# Altium PCB PT100.PcbDoc
Units mm, origin at the board's own origin, x right, y up, seen from the top; angles counter-clockwise.
Board outline 95.12 x 71.37 mm, 2 copper layers (Top Layer, Bottom Layer); 40 components, 28 nets, 103 pads, 11 vias.
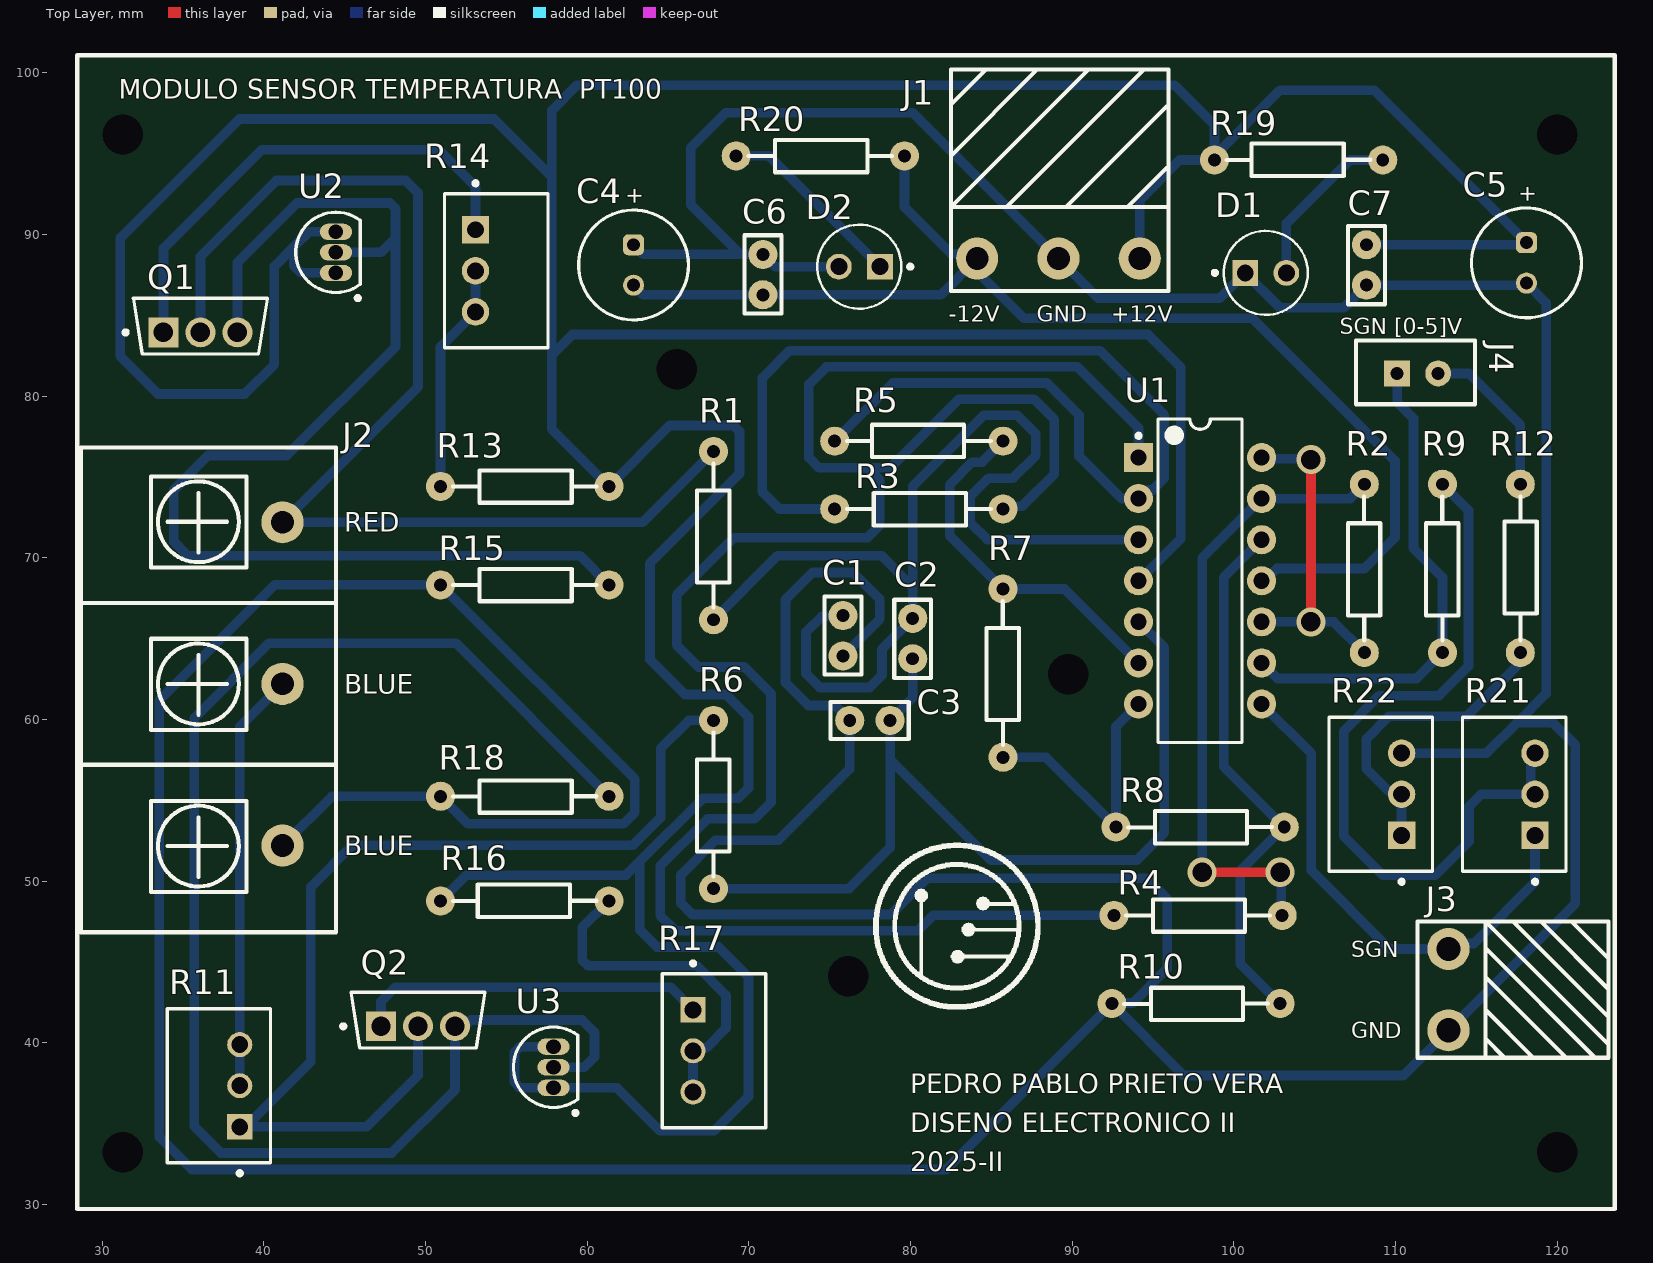
[diagram p0: Top Layer view]
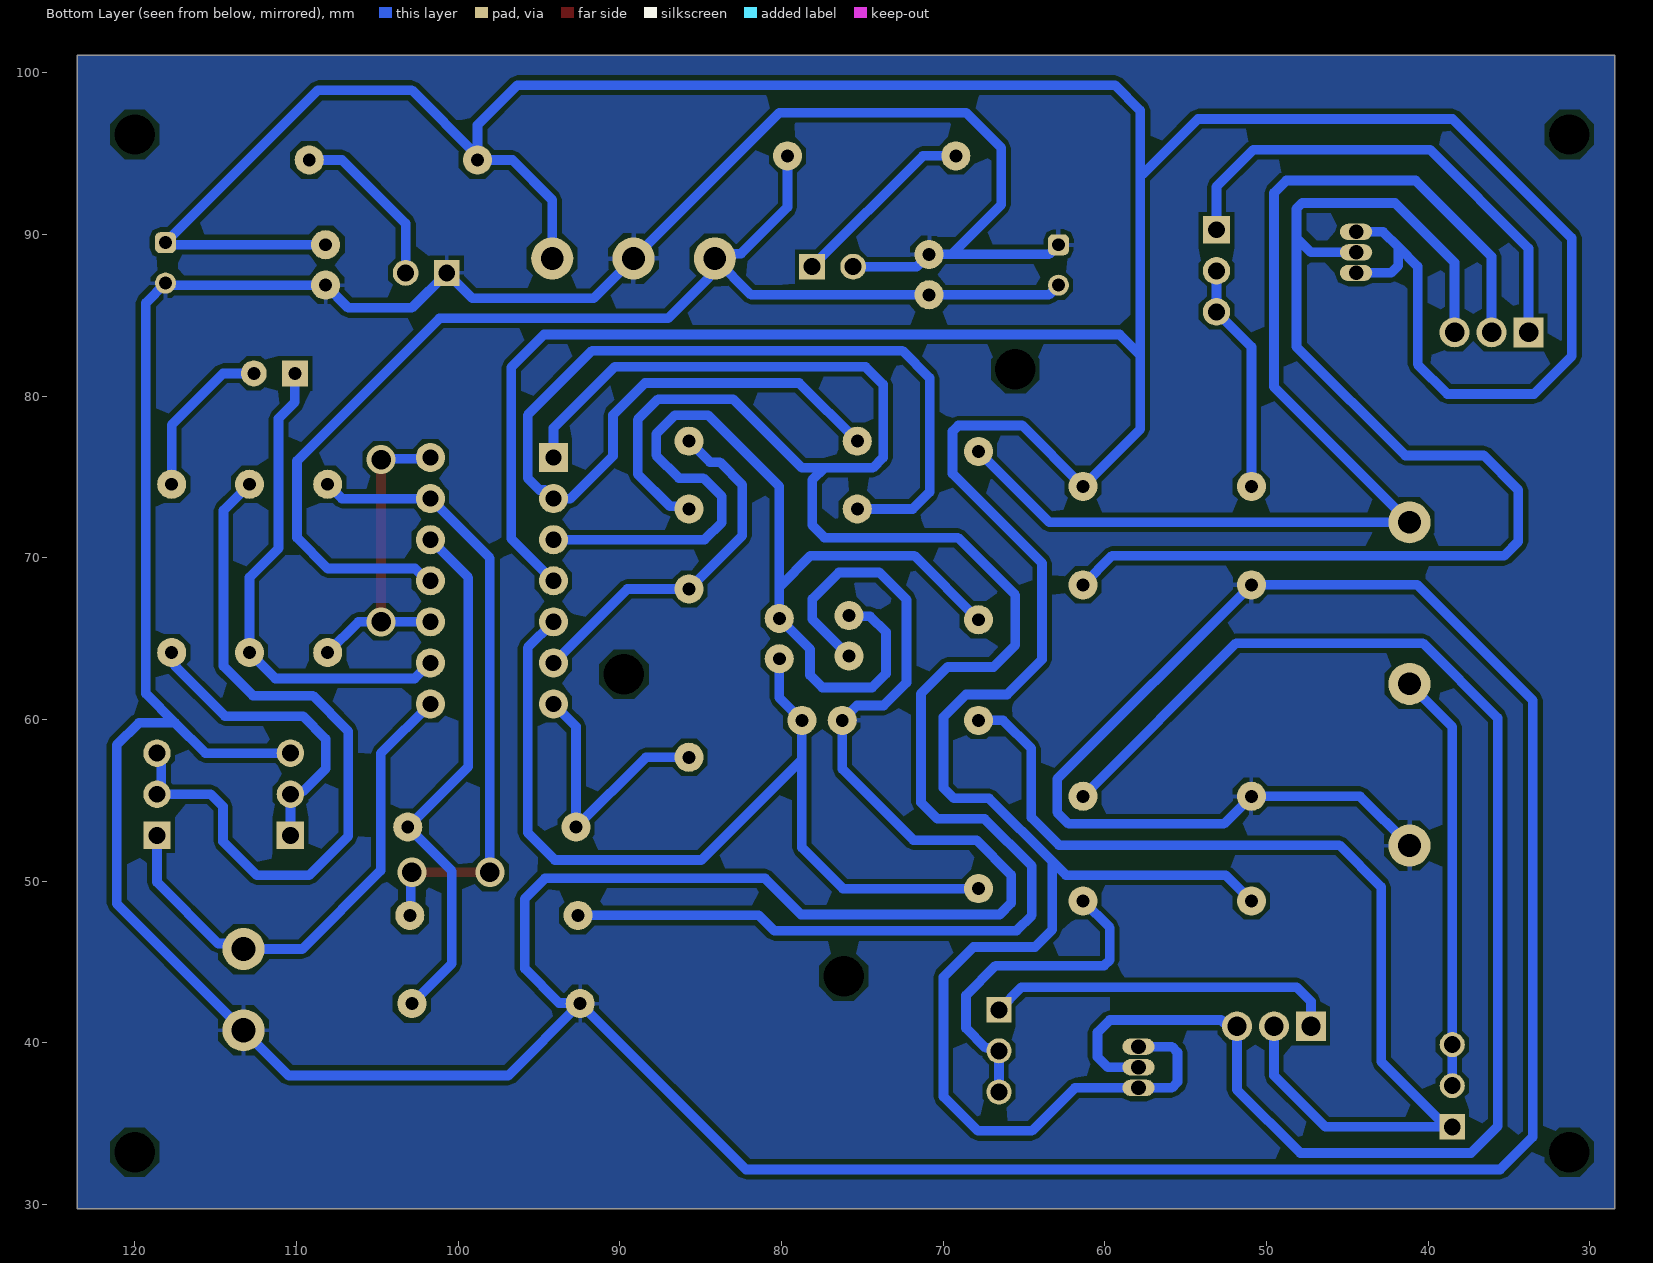
[diagram p1: Bottom Layer view, seen from below]

## Layer stack, top to bottom
Top Solder: solder mask 0.0102, Solder Resist, Dk 3.5
Top Layer: signal copper 0.0356
Dielectric 1: dielectric 0.32, FR-4, Dk 4.8
Bottom Layer: signal copper 0.0356
Bottom Solder: solder mask 0.0102, Solder Resist, Dk 3.5

## Board outline
28.448,29.718 28.448,101.092 123.571,101.092 123.571,29.718

## Design rules (kind name [scope] priority, off if disabled: settings)
Clearance [All] p1: gap=0.27 ignorepadtopadclearanceinfootprint=FALSE
PolygonConnect [All] p1: connectstyle=Relief reliefconductorwidth=0.254 reliefentries=4 polygonreliefangle="90 Angle" airgapwidth=0.254
RoutingVias [All] p1: holewidth=0.711 width=1.27 viastyle="Through Hole" minholewidth=0.711 minwidth=1.27 maxholewidth=0.711 maxwidth=1.27
SolderMaskExpansion [All] p1: expansion=0.102 istentingtop=FALSE
Width [All] p1: maxlimit=0.9 minlimit=0.6 preferedwidth=0.6
30 further rules are at their usual default settings.

## Components (designator, comment, footprint, x,y, rotation, side; value= is the part's Value field where it differs from the comment)
C1 "220pF" CAP_CER_2.5mm 75.819,63.921 r90 top
C2 "10nF" CAP_CER_2.5mm 80.137,66.254 r270 top
C3 "220pF" CAP_CER_2.5mm 78.74,59.944 r180 top
C4 "1uF" WCAP-ATG8_D6.3H11 62.865,88.118 r90 top
C5 "1uF" WCAP-ATG8_D6.3H11 118.11,88.245 r90 top
C6 "100nF" CAP_CER_2.5mm 70.866,86.273 r90 top
C7 "100nF" CAP_CER_2.5mm 108.204,89.368 r270 top
D1 "TLLG4400-AS12" FP-6_544-5255_01-4-MFG 101.981,87.63 r0 top
D2 "TLLG4400-AS12" FP-6_544-5255_01-4-MFG 76.835,88.011 r180 top
J1 "BORNERA_3P" BORNERA_3P 94.184,88.519 r180 top
J2 "BORNERA KF1000" "KF1000 - 10 - 3P" 41.148,62.197 r270 top
J3 "BORNERA_2P_NT" BORNERA_2P_NT 118.364,43.18 r90 top
J4 "TSW-2P" TSW-2P 110.109,81.407 r0 top
Q1 "BD140" FP-340AS-MFG 36.068,84.334 r90 top
Q2 "BD140" FP-340AS-MFG 49.53,41.402 r90 top
R1 "3.9K" RES_10K_1/4W 67.818,67.31 r90 top
R2 "43K" RES_10K_1/4W 108.077,65.278 r90 top
R3 "24K" RES_10K_1/4W 84.582,73.025 r180 top
R4 "43K" RES_10K_1/4W 101.854,47.879 r180 top
R5 "1.41K" RES_10K_1/4W 76.454,77.216 r0 top
R6 "3.9K" RES_10K_1/4W 67.818,50.673 r90 top
R7 "24K" RES_10K_1/4W 85.725,58.801 r90 top
R8 "43K" RES_10K_1/4W 101.981,53.34 r180 top
R9 "1K" RES_10K_1/4W 112.916,65.278 r90 top
R10 "43K" RES_10K_1/4W 101.727,42.418 r180 top
R11 "100 Ohms" BOUR-3299W-3_V#1 37.211,37.338 r90 top
R12 "1K" RES_10K_1/4W 117.729,73.406 r270 top
R13 "1.764K" RES_10K_1/4W 60.198,74.422 r180 top
R14 "500 Ohms" BOUR-3299W-3_V#2 54.376,87.757 r270 top
R15 "1K" RES_10K_1/4W 60.198,68.326 r180 top
R16 "1.764K" RES_10K_1/4W 52.07,48.768 r0 top
R17 "500 Ohms" BOUR-3299W-3_V#1 67.838,39.497 r270 top
R18 "1K" RES_10K_1/4W 60.198,55.245 r180 top
R19 "1k" RES_10K_1/4W 99.949,94.615 r0 top
R20 "1k" RES_10K_1/4W 78.486,94.869 r180 top
R21 "100 Ohms" BOUR-3299W-3_V#2 117.348,55.372 r90 top
R22 "100 Ohms" BOUR-3299W-3_V#2 109.093,55.372 r90 top
U1 "TL084MJ" J0014A 97.917,68.58 r0 top
U2 "TL431CZ" TO-92 44.45,88.9 r0 top
U3 "TL431CZ" TO-92 57.912,38.481 r0 top

## Footprints (in the part's own frame and the unit in brackets; to place one, negate y for a bottom-side part, rotate by r counter-clockwise, add the part's x,y. Pads: shape width x height; smd on the part's side, far side on the other; paste and mask are expansions set on the pad)
BORNERA_2P_NT [mm]
  round 2.6 hole 1.5: 1(-2.413,5.08) 2(2.617,5.08)
  silkscreen extent -4.11,-4.83 4.32,6.98, body extent -4.06,-2.29 4.44,6.86, height 7.1
BORNERA_3P [mm] "Bornera 3 pines 5.03mm"
  round 2.6 hole 1.4: 1(0,0) 2(5.03,0) 3(10.06,0)
  silkscreen extent -1.78,-11.7 11.68,2, body extent -1.16,-7.39 11.07,1.81, height 7
BOUR-3299W-3_V#1 [mm] "TH, 3-Leads, Body 9.53x6.4mm, Pitch 2.54mm"
  rect 1.55x1.55 hole 1.05: 1(-2.54,-1.29)
  round 1.55 hole 1.05: 2(0,-1.29) 3(2.54,-1.29)
  silkscreen extent -5.54,-3.2 4.76,3.2, body extent -4.76,-3.05 4.76,3.05, height 11.55
BOUR-3299W-3_V#2 [mm] "TH, 3-Leads, Body 9.53x6.4mm, Pitch 2.54mm"
  rect 1.7x1.7 hole 1.05: 1(-2.54,-1.29)
  round 1.7 hole 1.05: 2(0,-1.29) 3(2.54,-1.29)
  silkscreen extent -5.54,-3.2 4.76,3.2, body extent -4.76,-3.05 4.76,3.05, height 11.55
CAP_CER_2.5mm [mm] "Capacitor ceramico 2.5mm"
  round 1.8 hole 0.8: 1(0,0) 2(2.5,0)
  silkscreen extent -1.15,-1.14 3.68,1.14, body extent -1.23,-1.27 3.77,0.76, height 5.5
FP-6_544-5255_01-4-MFG [mm]
  rect 1.6x1.6 hole 1.05 paste-1000 mask+0: 1(-1.27,0)
  round 1.6 hole 1.05 paste-1000 mask+0: 2(1.27,0)
  silkscreen extent -3.27,-2.6 2.6,2.6, body extent -2.32,-2.32 2.32,2.32, height 0.25
FP-340AS-MFG [mm]
  rect 1.85x1.85 hole 1.2 paste-1000 mask+0: 1(-0.387,2.29)
  round 1.85 hole 1.2 paste-1000 mask+0: 2(-0.387,0) 3(-0.387,-2.29)
  silkscreen extent -1.73,-4.15 1.73,4.75, body extent -1.83,-4.25 1.83,4.25, height 0.25
J0014A [mm] "DIP, 14-Leads, Body 19.95x7.2mm, Pitch 2.54mm"
  rect 1.8x1.8 hole 1: 1(-3.81,7.62)
  round 1.8 hole 1: 2(-3.81,5.08) 3(-3.81,2.54) 4(-3.81,0) 5(-3.81,-2.54) 6(-3.81,-5.08) 7(-3.81,-7.62) 8(3.81,-7.62) 9(3.81,-5.08) 10(3.81,-2.54) 11(3.81,0) 12(3.81,2.54) 13(3.81,5.08) 14(3.81,7.62)
  silkscreen extent -3.93,-10 2.6,10, body extent -3.96,-9.97 3.96,9.97, height 5.08
"KF1000 - 10 - 3P" [mm] "Bornera KF1000 10mm de 3 pines"
  round 2.6 hole 1.4: 0(-10,0) 1(0,0) 2(10,0)
  silkscreen extent -14.63,-12.47 15.37,3.3, body extent -14.95,-11.95 15.85,2.55, height 14.55
RES_10K_1/4W [mm] "Resistencia de 10Kohms de 1/4 de vatio"
  round 1.8 hole 0.8: 1(-1.143,0) 2(9.271,0)
  silkscreen extent -0.38,-0.98 8.51,1.02, body extent -1.45,-1.14 9.32,1.17, height 2.93
TO-92 [mm] "TO, Flat Index; 3 In-Line, Axial Leads; Body Dia. 4.7mm; Lead Dia. 0.56 mm (max)"
  oval 2x1 hole 0.9: 1(0,-1.27) 2(0,0) 3(0,1.27)
  silkscreen extent -2.48,-2.95 1.5,2.48, body extent -2.48,-2.5 1.5,2.5, height 4.95
TSW-2P [mm] "TSW PIN HEADER MALE 2P"
  rect 1.6x1.6 hole 0.8: 01(0,0)
  round 1.6 hole 0.8: 02(2.54,0)
  silkscreen extent -2.54,-1.91 4.83,2.03, body extent -1.27,-1.27 3.81,1.27, height 8.34
WCAP-ATG8_D6.3H11 [mm] "Aluminum Electrolytic Capacitors, 6.3x11mm"
  rrect50% 1.3x1.3 hole 0.8: 1(1.25,0)
  round 1.3 hole 0.8: 2(-1.25,0)
  silkscreen extent -3.4,-3.4 3.4,3.4, body extent -3.14,-3.15 3.15,3.15, height 11.31

## Part data
C1 C2 C3 C6 C7: library part CER_104, "Capactior ceramico 2.5mm"
C4 C5: library part CMP-207834-000007-2, "CAP 220 UF 20% 25 V", Capacitance=220µF, Case/Package=Radial, Leakage Current=55µA, Max Operating Temperature=85°C, Min Operating Temperature=-40°C, Ripple Current=310mA, Tolerance=20%, Voltage Rating=25V, Diameter=6.3mm, Dissipation Factor=14%, Height=11mm, Height - Seated (Max)=12.4968mm, Lead Pitch=2.4892mm, Length=11mm, Life (Hours)=2000hours, Material=Aluminium, Mount="Through Hole", NexarPartId=54007213, Packaging="Tape & Box (TB)", Pitch=2.5mm, Polarity=Polar, REACH SVHC=Unknown, RoHS=Compliant, Voltage Rating (DC)=25V
D1 D2: library part CMP-02520-000017-1, "LED GREEN DIFFUSED T-1 T/H", Case/Package=T, Color=Green, Forward Current=7mA, Forward Voltage=2.4V, Max Operating Temperature=100°C, Min Operating Temperature=-40°C, Power Dissipation=20mW, Reverse Voltage=20V, Test Current=2mA, Depth=3.2mm, Dominant Wavelength=575nm, Length=3.2mm, Lens Style=Diffused, Luminous Intensity=2mcd, Mount="Through Hole", Number of Elements=1, Number of LEDs=1, Number of Pins=2, Packaging="Tape and Reel", Radiation Hardening=No, RoHS Compliant=No, Viewing Angle=50°
J1: "Conector 3 pines"
J2: library part KF1000, "10 mm distance KF1000"
Q1 Q2: library part CMP-00278-84408978-1, "BD14010STU Bipolar (BJT) Single Transistor, PNP, -80 V, 12.5 W, -1.5 A, 63", Case/Package=TO-126, Collector Base Voltage (VCBO)=-80V, Collector Emitter Breakdown Voltage=80V, Collector Emitter Saturation Voltage=-500mV, Current Rating=-1.5A, Emitter Base Voltage (VEBO)=-5V, Manufacturer Lifecycle Status=ACTIVE, Max Junction Temperature (Tj)=150°C, Max Power Dissipation=12.5W, Min Operating Temperature=-55°C, Power Dissipation=1.25W, Collector Emitter Voltage (VCEO)=-80V, Contact Plating=Tin, Element Configuration=Single, Height=11mm, hFE Min=40, Lead Free="Lead Free", Length=8mm, Lifecycle Status=Production, Max Collector Current=-1.5A, Max Operating Temperature=150°C, Mount="Through Hole", NexarPartId=84408978, Number of Elements=1, Number of Pins=3, Polarity=PNP, Radiation Hardening=No, REACH SVHC="No SVHC", RoHS=Compliant, Schedule B="8541290080, 8541290080", Voltage Rating (DC)=-80V, Weight=761mg, Width=3.25mm
R1 R2 R3 R4 R5 R6 R7 R8 R9 R10 R12 R13 R15 R16 R18 R19 R20: library part RES_10K_1/4W, "Resistencia de 100kohms de 1/4 de vatio"
R11 R14 R17 R21 R22: library part CMP-2000-05584-1, "Square Trimpot(R) Trimming Potentiometer, 10 KOhm, +/- 10%, 500 mW, -55 to 125 degC, 3-Pin THD, RoHS, Tube", Manufacturer=Bourns, Operating Temperature Range=-55Cto+125C, Package Description="3-Pin Surface Mount Device, Body 9.53 x 6.1 mm, Pitch 2.54 mm", Package Reference=3299W, Power Rating=500mW(1/2W), Resistance=10kOhms, Tolerance=10%, Adjustment=TopCrossed, Brand=Bourns, Datasheet URL=http://www.bourns.com/docs/Product-Datasheets/3299.pdf, Datasheet Version=04/2014, Element Type=Cermet, Length=10.03mm, Manufacturer URL=http://www.bourns.com/, Mounting=PanelMount, Mounting Technology=ThroughHole, Packaging=Tube, Product=Multiturn, Product Category=TrimmerResistors-ThroughHole, Product Type=SquareTrimmingPotentiometer, Qualification=Commercial, RoHS="No /  / RoHSVersionAvailable", Series=3299, Taper=Linear, Termination Style=Pin, Tradename=Trimpot, Type=Trimmers, Unit Weight=0.035000oz, Width=9.53mm
U1: library part CMP-0017-00779-2, "High Speed JFET-Input Quad Operational Amplifier, -55 to 125 degC, 14-pin DIP (J14)", Manufacturer="Texas Instruments", Rating=Military, CMRR(Min)(dB)=80, ComponentLink1Description="Manufacturer URL", ComponentLink1URL=http://www.ti.com/, ComponentLink2Description=Datasheet, ComponentLink2URL=http://www.ti.com/lit/ds/symlink/tl084m.pdf, ComponentLink3Description="Package Specification", ComponentLink3URL=http://www.ti.com/litv/pdf/mcer002d, DatasheetVersion=SLOS081G, IIB(Max)(pA)=200, Mounting Technology="Through Hole", Offset Drift(Typ)(uV/C)=18, PackageDescription="14-Pin Ceramic, Glass In-Line, Row Spacing 7.62 mm, Pitch 2.54 mm", PackageReference=J0014A, PackageVersion="4040083/F, 03/2003", PartNumber=TL084MJ, Slew Rate(Typ)(V/us)=13, Sub Family="General Purpose Amplifier", Vio (25C)(Max)(mV)=9, Vn at 1kHz(Typ)(nV/rtHz)=18
U2 U3: library part CMP-0242-00004-1, "Programmable Voltage Reference, 2.5 to 36V, 3-Pin TO-92", ComponentLink1Description="Manufacturer URL", ComponentLink1URL=http://www.st.com, ComponentLink2Description=Datasheet, ComponentLink2URL=http://www.st.com/internet/com/TECHNICAL_RESOURCES/TECHNICAL_LITERATURE/DATASHEET/CD00000986.pdf, DatasheetVersion=Oct-2011, PackageDescription="TO, Flat Index; 3 In-Line, Axial Leads; Body Dia. 4.7mm; Lead Dia. 0.56 mm (max)", PackageReference=TO-92, PackageVersion=2011

## Via types
v1: diameter 1/1 (per signal layer), hole 2.5, Top Layer to Bottom Layer, 7 vias
v2: diameter 1.8/1.8 (per signal layer), hole 1.2, Top Layer to Bottom Layer, 4 vias

## Nets (pads, with @x,y where several pads share a name; then routed paths per layer and width w, separated by ;. In a path a pad name is that pad's centre, name@x,y a point inside that pad or via, vN(x,y) a via of type N, cw(c..) or ccw(c..) an arc to the next point about the centre after c; other vN are vias at no path point)
+12V: C5.1 C7.1 J1.1 R13.1 R16.1 R19.1 U1.4 U2.1 U2.3 U3.1 U3.3 | length 333.5
  Bottom Layer w0.6: U2.1 42.291,87.63 41.834,88.087 41.834,89.23 ; U2.3 42.774,90.17 41.834,89.23 ; R16.1 52.527,50.368 62.4,50.368 63.246,51.215 ; 57.658,93.726 54.229,97.155 38.481,97.155 31.115,89.789 31.115,82.467 33.445,80.137 38.804,80.137 40.64,81.973 40.64,88.036 41.834,89.23 ; U3.3 55.85,39.751 55.499,39.4 55.499,37.562 55.85,37.211 U3.1 61.849,37.211 64.516,34.544 67.858,34.544 69.977,36.663 69.977,44.069 68.123,45.923 64.313,45.923 63.246,46.99 63.246,51.215 ; U1.4 96.723,71.196 96.723,81.788 94.695,83.816 59.076,83.816 57.81,82.55 ; J1.1 94.184,92.152 96.647,94.615 R19.1 ; C7.1 117.983,89.368 C5.1 108.672,98.933 102.87,98.933 98.806,94.869 R19.1 ; 57.81,82.55 57.81,97.688 59.36,99.238 96.342,99.238 98.806,96.774 R19.1 ; 57.81,82.55 57.81,77.953 R13.1 65.1,78.181 69.063,78.181 69.418,77.826 69.418,75.209 63.881,69.672 63.881,63.703 66.04,61.544 68.58,61.544 69.977,60.147 69.977,55.753 69.342,55.118 67.149,55.118 63.246,51.215
-12V: C4.2 C6.1 J1.3 R20.1 U1.11 | length 77.1
  Bottom Layer w0.6: C4.2 63.46,86.273 C6.1 81.878,86.273 J1.3 ; R20.1 79.629,91.694 82.508,88.815 83.828,88.815 J1.3 ; U1.11 101.916,68.58 102.678,69.342 108.077,69.342 109.982,71.247 109.982,75.997 101.162,84.817 87.014,84.817 84.507,87.324 84.507,88.136 J1.3
"CORRIENTE A": J2.0 Q1.2 R1.2 | length 72.8
  Bottom Layer w0.6: Q1.2 36.068,88.646 40.767,93.345 48.768,93.345 49.53,92.583 49.53,80.579 J2.0 63.434,72.197 R1.2
"CORRIENTE B": Q2.2 R6.2 R11.1 | length 63.8
  Bottom Layer w0.6: R11.1 R11.1@38.862,34.798 ; Q2.2 49.53,37.973 46.355,34.798 R11.1@38.862,34.798 ; R6.2 66.294,59.944 64.546,58.196 64.546,53.929 62.84,52.222 45.491,52.222 42.901,49.632 42.901,38.837 39.337,35.273 38.976,35.273 38.862,35.159 R11.1@38.862,34.798
GND: C1.1 C3.2 C4.1 C5.2 C6.2 C7.2 D1.1 D2.2 J1.2 J2.2 J3.1 R10.2 R15.2 R18.2 R22.3 | length 400.6
  Bottom Layer w0.6: J2.2 44.196,55.245 R18.2 52.629,53.543 62.23,53.543 62.941,54.254 62.941,56.312 R15.2 40.665,68.326 33.528,61.189 33.528,34.163 35.535,32.156 82.194,32.156 R10.2 ; C4.1 63.46,88.773 69.469,88.773 ; D2.2 71.628,88.011 C6.2 69.469,88.773 ; C1.1 78.094,66.196 78.094,67.448 76.454,69.088 73.945,69.088 72.263,67.406 72.263,62.275 73.68,60.858 75.326,60.858 C3.2 76.24,56.936 71.834,52.53 67.937,52.53 65.786,50.379 65.786,48.641 66.497,47.93 78.791,47.93 81.026,50.165 94.634,50.165 95.885,48.914 95.885,44.577 93.764,42.456 92.494,42.456 R10.2 ; R22.3 115.646,57.912 117.526,59.792 ; 69.469,88.773 66.397,91.845 66.397,95.353 68.58,97.536 80.137,97.536 J1.2 91.622,86.051 99.132,86.051 D1.1 102.87,85.471 106.807,85.471 C7.2 117.983,86.868 C5.2 119.329,85.776 119.329,61.595 117.526,59.792 ; R10.2 96.901,37.973 110.49,37.973 J3.1 121.133,48.616 121.133,58.42 119.761,59.792 117.526,59.792
NetC1_2: C1.2 C2.1 R1.1 U1.3 | length 66.7
  Bottom Layer w0.6: R1.1 71.78,70.129 78.207,70.129 80.137,68.199 ; C1.2 75.781,66.383 74.511,66.383 73.533,65.405 73.533,62.831 74.388,61.976 77.47,61.976 78.232,62.738 78.232,64.349 C2.1 80.137,68.199 ; U1.3 84.76,71.12 83.693,72.187 83.693,73.787 84.836,74.93 86.344,74.93 87.757,76.343 87.757,77.673 86.614,78.816 84.53,78.816 80.137,74.423 80.137,68.199
NetC2_2: C2.2 C3.1 R6.1 U1.5 | length 58.2
  Bottom Layer w0.6: R6.1 76.2,49.53 78.74,52.07 78.74,57.531 ; C2.2 80.137,61.341 C3.1 78.74,57.531 ; U1.5 95.707,64.44 95.707,52.99 94.026,51.308 84.963,51.308 78.74,57.531
NetD1_2: D1.2 R19.2 | length 10.6
  Bottom Layer w0.6: D1.2 103.251,90.678 107.188,94.615 R19.2
NetD2_1: D2.1 R20.2 | length 11.7
  Bottom Layer w0.6: R20.2 71.247,94.869 D2.1
NetJ2_1: J2.1 R11.2 R11.3 | length 26
  Bottom Layer w0.6: R11.2 R11.3 38.501,59.55 J2.1
NetJ3_2: J3.2 R21.1 U1.8 | length 32
  Bottom Layer w0.6: U1.8 104.8,57.887 104.8,50.648 109.651,45.797 J3.2 113.63,46.143 114.85,46.143 118.638,49.931 R21.1
NetJ4_01: J4.01 R9.1 U1.9 | length 30.7
  Bottom Layer w0.6: U1.9 102.692,62.535 111.316,62.535 R9.1 112.916,68.796 111.125,70.587 111.125,78.613 110.109,79.629 J4.01
NetJ4_02: J4.02 R12.1 | length 10.1
  Bottom Layer w0.6: J4.02 114.554,81.407 117.729,78.232 R12.1
NetQ1_1: Q1.1 R14.1 | length 30.7
  Bottom Layer w0.6: Q1.1 33.778,89.15 39.878,95.25 50.8,95.25 53.086,92.964 R14.1
NetQ1_3: Q1.3 R15.1 U2.2 | length 77
  Bottom Layer w0.6: Q1.3 38.358,88.269 42.037,91.948 47.782,91.948 48.133,91.597 48.133,89.789 ; U2.2 47.244,88.9 48.133,89.789 ; R15.1 59.538,70.129 35.282,70.129 34.417,70.994 34.417,74.195 36.549,76.327 41.402,76.327 48.133,83.058 48.133,89.789
NetQ2_1: Q2.1 R17.1 | length 21.8
  Bottom Layer w0.6: Q2.1 47.24,42.545 48.129,43.434 65.151,43.434 R17.1
NetQ2_3: Q2.3 R18.1 U3.2 | length 92.6
  Bottom Layer w0.6: U3.2 59.817,38.481 60.452,39.116 60.452,40.64 59.69,41.402 52.796,41.402 52.648,41.254 52.059,41.254 Q2.3 51.82,37.088 47.903,33.171 37.339,33.171 35.687,34.823 35.687,60.087 40.319,64.719 51.867,64.719 R18.1
NetR2_1: R2.1 U1.10 U1.14 | length 20.3
  Top Layer w0.6: v2(104.775,66.04) v2(104.775,76.073)
  Bottom Layer w0.6: U1.10 v2(104.775,66.04) 106.172,66.04 R2.1 ; U1.14 101.79,76.136 104.712,76.136 v2(104.775,76.073)
NetR2_2: R2.2 R4.1 U1.13 | length 38.9
  Top Layer w0.6: v2(98.044,50.546) v2(102.87,50.546)
  Bottom Layer w0.6: v2(98.044,50.546) 98.044,69.977 U1.13 107.188,73.66 R2.2 ; v2(102.87,50.546) 102.933,50.482 102.933,47.942 R4.1
NetR3_1: R3.1 R4.2 U1.1 | length 129.5
  Bottom Layer w0.6: R3.1 85.89,73.19 86.906,73.19 88.9,75.184 88.9,78.546 87.63,79.816 82.991,79.816 78.74,75.565 77.35,75.565 ; R4.2 81.399,47.879 80.45,46.93 65.465,46.93 64.516,47.879 64.516,50.936 67.428,53.848 70.358,53.848 71.374,54.864 71.374,61.595 69.723,63.246 66.878,63.246 65.532,64.592 65.532,67.691 69.088,71.247 77.336,71.247 78.105,72.016 78.105,74.81 77.35,75.565 ; U1.1 94.107,78.034 90.325,81.816 74.806,81.816 73.711,80.721 73.711,76.2 74.346,75.565 77.35,75.565
NetR3_2: R3.2 R5.1 U1.2 | length 69.9
  Bottom Layer w0.6: R3.2 71.882,73.025 70.837,74.07 70.837,81.124 72.529,82.816 91.712,82.816 95.707,78.821 95.707,74.93 94.971,74.193 94.64,74.193 U1.2 93.062,73.66 90.424,76.298 90.424,78.834 88.442,80.816 78.911,80.816 R5.1
NetR5_2: R5.2 R7.2 U1.6 | length 22.5
  Bottom Layer w0.6: R5.2 84.421,75.912 83.82,75.912 82.423,74.515 82.423,71.374 R7.2 89.535,68.072 U1.6
NetR7_1: R7.1 R8.2 U1.7 | length 17
  Bottom Layer w0.6: R7.1 88.392,57.658 R8.2 92.71,59.563 U1.7
NetR8_1: R8.1 R10.1 U1.12 | length 33.4
  Bottom Layer w0.6: U1.12 99.377,68.77 99.377,57.087 R8.1 100.397,50.613 100.397,44.891 R10.1
NetR9_2: R9.2 R21.2 R21.3 | length 46.2
  Bottom Layer w0.6: R9.2 114.529,72.936 114.529,63.297 112.7,61.468 108.999,61.468 106.807,59.276 106.807,52.77 109.22,50.357 112.46,50.357 114.554,52.451 114.554,54.61 115.316,55.372 118.13,55.372 118.377,55.619 118.377,57.651 R21.3
NetR12_2: R12.2 R22.1 R22.2 | length 19.3
  Bottom Layer w0.6: R22.1 R22.2 110.201,55.554 109.592,55.554 108.204,56.941 108.204,58.801 109.601,60.198 114.427,60.198 117.499,63.27 117.499,63.905 R12.2
NetR13_2: R13.2 R14.2 R14.3 | length 14.2
  Bottom Layer w0.6: R13.2 50.927,83.058 R14.3 R14.2
NetR16_2: R16.2 R17.2 R17.3 | length 21.3
  Bottom Layer w0.6: R16.2 59.69,47.117 59.69,45.113 60.041,44.761 66.745,44.761 68.58,42.926 68.58,40.894 67.365,39.679 66.73,39.679 R17.2 R17.3
copper on no net:
  other v1: 31.257,33.231 120.015,33.231 76.159,44.123 89.748,62.792 65.532,81.661 31.257,96.191 120.015,96.191

## Polygon pours and split planes (outlines as drawn)
GND on Bottom Layer "NONET_L-01_P-001" (solid, pour order 0): 28.448,101.092 123.571,101.092 123.571,29.718 28.448,29.718

## Silkscreen, mask and mechanical layers (free items; w line width, h text height)
Top Overlay:
  drawing of 6 lines, arcs and shapes, not listed
  text "MODULO SENSOR TEMPERATURA  PT100" at 31.007,98.4 h1.2
  text "-12V" at 82.375,84.601 h1
  text "GND" at 87.821,84.601 h1
  text "+12V" at 92.435,84.601 h1
  text "SGN [0-5]V" at 106.572,83.839 h1
  text "RED" at 44.977,71.597 h1.2
  text "BLUE" at 44.977,61.597 h1.2
  text "BLUE" at 44.977,51.597 h1.2
  text "SGN" at 107.268,45.297 h1
  text "GND" at 107.268,40.267 h1
  text "PEDRO PABLO PRIETO VERA" at 79.973,36.866 h1.2
  text "DISENO ELECTRONICO II" at 79.973,34.453 h1.2
  text "2025-II" at 79.973,32.04 h1.2

## Text inside footprints (layer, text, board x,y; h text height)
C4: Top Overlay "+" at 63.365,91.818 h1 r90
C5: Top Overlay "+" at 118.61,91.945 h1 r90